# Altium PCB Copy of PCB1.PcbDoc (part 2 of 2)
Units mm, origin at the board's own origin, x right, y up, seen from the top; angles counter-clockwise.
Board outline 245 x 100 mm, 2 copper layers (Top Layer, Bottom Layer); 174 components, 196 nets, 709 pads, 287 vias.
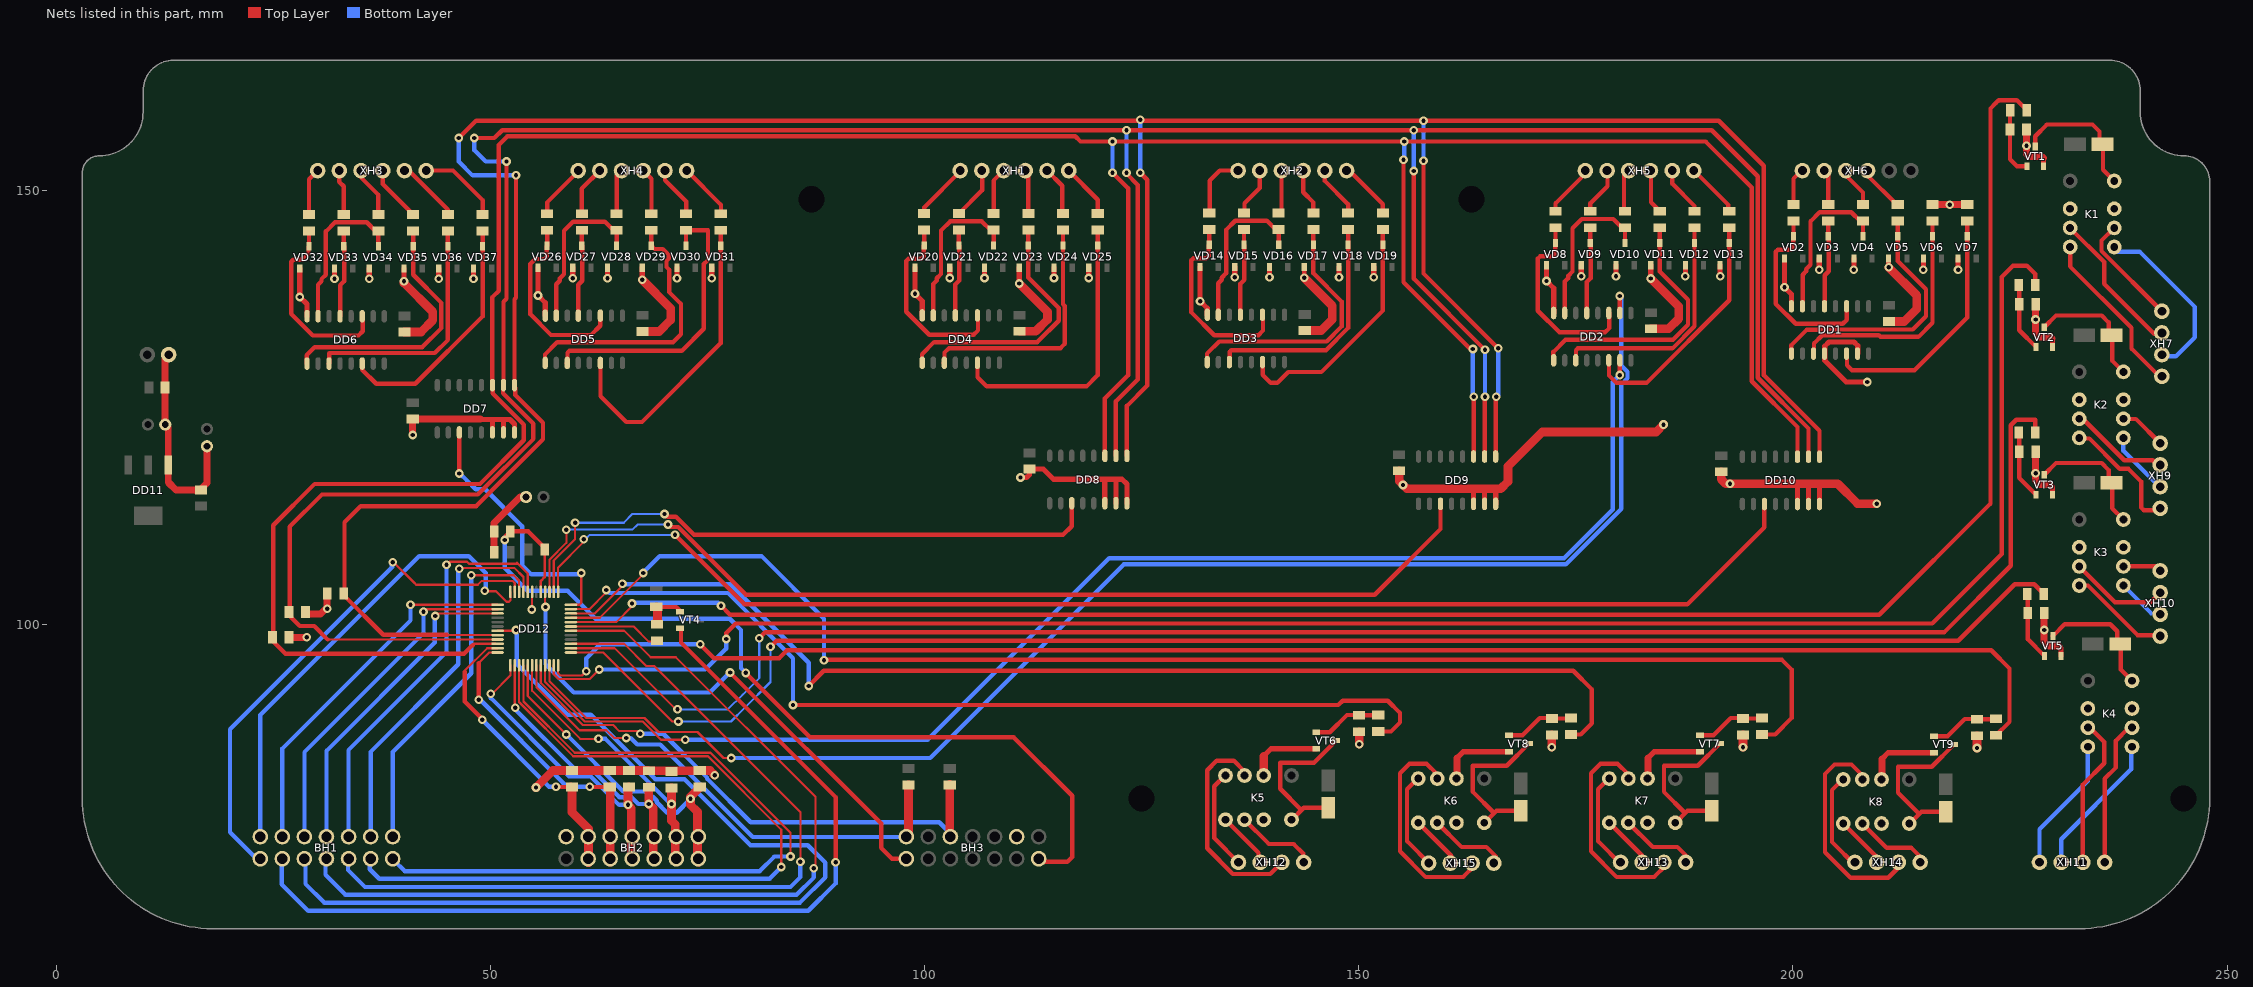
[diagram p2: the nets of this part, all layers, seen from the top]

## Via types
v1: diameter 1, hole 0.5, Top Layer to Bottom Layer, tented both sides, 287 vias

## Nets (pads, with @x,y where several pads share a name; then routed paths per layer and width w, separated by ;. In a path a pad name is that pad's centre, name@x,y a point inside that pad or via, vN(x,y) a via of type N, cw(c..) or ccw(c..) an arc to the next point about the centre after c; other vN are vias at no path point) (continued)
GND: BH2.14 BH3.9 C1.2 C2.2 C3.2 C4.2 C5.2 C6.2 C7.1 C8.1 C9.2 C10.2 C11.1 C12.1 C13.1 C14.2 C15.1 C16.1 C17.1 DD1.8 DD1.12 DD1.15 DD2.8 DD3.8 DD4.8 DD5.8 DD6.8 DD7.6 DD7.7 DD7.8 DD8.6 DD8.7 DD8.8 DD9.6 DD9.7 DD9.8 DD10.6 DD10.7 DD10.8 DD11.1 DD12.7 K1.2 K1.7 K2.2 K2.7 K3.2 K3.7 K4.2 K4.7 K5.2 K5.7 K6.2 K6.7 K7.2 K7.7 K8.2 K8.7 R2.1 R7.1 R8.1 R40.1 R42.1 R45.1 R47.1 R48.1 R50.1 R52.1 R55.1 R56.1 R58.1 R61.1 R62.1 R63.1 R64.1 R65.1 R66.1 VD2.1 VD3.1 VD4.1 VD5.1 VD6.1 VD7.1 VD8.1 VD9.1 VD10.1 VD11.1 VD12.1 VD13.1 VD14.1 VD15.1 VD16.1 VD17.1 VD18.1 VD19.1 VD20.1 VD21.1 VD22.1 VD23.1 VD24.1 VD25.1 VD26.1 VD27.1 VD28.1 VD29.1 VD30.1 VD31.1 VD32.1 VD33.1 VD34.1 VD35.1 VD36.1 VD37.1 VT1.2 VT2.2 VT3.2 VT5.2 VT6.2 VT7.2 VT8.2 VT9.2 XH8.2 | length 386.2
  Top Layer w0.25: v1(54.75,101.75) 54.8,101.8 DD12.7@54.8,103.775
  Top Layer w0.5: v1(143.729,139.971) VD17.1@143.729,141.2
  Top Layer w0.6: VD32.1@28.05,141.029 v1(28.05,137.75) 28.881,136.919 DD6.8@28.881,135.529 ; v1@32.05,139.748 v1(32.05,139.829) VD33.1@32.05,141.029 ; v1@36.05,139.748 v1(36.05,139.829) VD34.1@36.05,141.029 ; v1(40.05,139.55) VD35.1@40.05,141.029 ; v1@44.05,139.748 v1(44.05,139.829) VD36.1@44.05,141.029 ; v1@48.05,139.748 v1(48.05,139.829) VD37.1@48.05,141.029 ; 48.25,123.7 48.3,123.65 48.9,123.65 ; 48.85,123.7 48.9,123.65 ; DD7.6@50.229,122.15 50.229,123.55 ; DD7.7@51.499,122.15 51.499,123.301 ; DD7.8@52.769,122.15 52.769,123.131 52.25,123.65 48.9,123.65 ; VD26.1@55.479,141.1 v1(55.479,137.921) 56.31,137.09 DD5.8@56.31,135.6 ; v1@59.479,139.819 v1(59.479,139.9) VD27.1@59.479,141.1 ; v1@63.479,139.819 v1(63.479,139.9) VD28.1@63.479,141.1 ; v1(67.479,139.721) VD29.1@67.479,141.1 ; v1@71.479,139.819 v1(71.479,139.9) VD30.1@71.479,141.1 ; v1@75.479,139.819 v1(75.479,139.9) VD31.1@75.479,141.1 ; VD20.1@98.9,141.125 v1(98.9,138.1) 99.731,137.269 DD4.8@99.731,135.625 ; v1@102.9,139.844 v1(102.9,139.925) VD21.1@102.9,141.125 ; v1@106.9,139.844 v1(106.9,139.925) VD22.1@106.9,141.125 ; VD23.1@110.9,141.125 v1(110.9,139.3) v1@110.95,139.25 ; v1(111.05,116.95) 111.75,116.95 112.081,117.281 C11.1@112.081,117.925 113.675,117.925 114.85,116.75 120.85,116.75 ; v1@114.9,139.844 v1(114.9,139.925) VD24.1@114.9,141.125 ; v1@118.9,139.844 v1(118.9,139.925) VD25.1@118.9,141.125 ; DD8.6@120.76,114 120.76,116.66 120.85,116.75 ; DD8.7@122.03,114 122.03,116.67 121.95,116.75 ; DD8.8@123.3,114 123.3,116.2 122.75,116.75 121.95,116.75 ; VD14.1@131.729,141.2 v1(131.729,137.271) 132.56,136.44 DD3.8@132.56,135.7 ; v1@135.729,139.919 v1(135.729,140) VD15.1@135.729,141.2 ; 139.05,84.85 139.909,85.709 VT6.2@145.1,85.709 ; v1@139.729,139.919 v1(139.729,140) VD16.1@139.729,141.2 ; v1@147.729,139.919 v1(147.729,140) VD18.1@147.729,141.2 ; v1@151.729,139.919 v1(151.729,140) VD19.1@151.729,141.2 ; 161.3,84.65 162.009,85.359 VT8.2@167.3,85.359 ; 163.05,115.65 163.229,115.471 DD9.6@163.229,113.925 ; 163.95,115.65 164.05,115.55 164.499,115.55 ; DD9.7@164.499,113.925 164.499,115.55 ; 164.499,115.65 164.499,115.55 ; 165.35,115.55 164.499,115.55 ; DD9.8@165.769,113.925 165.769,115.131 ; VD8.1@171.619,141.4 v1(171.619,139.581) 172.45,138.75 DD2.8@172.45,135.9 ; v1(175.619,140.119) VD9.1@175.619,141.4 ; v1(179.619,140.119) VD10.1@179.619,141.4 ; 183.3,84.65 184.009,85.359 VT7.2@189.3,85.359 ; VD11.1@183.619,141.4 v1(183.619,139.881) v1@183.65,139.85 ; v1(187.619,140.119) VD12.1@187.619,141.4 ; v1(191.619,140.119) VD13.1@191.619,141.4 ; VD2.1@199.025,142.179 v1(199.025,138.875) 199.831,138.069 DD1.8@199.831,136.679 ; 200.5,116.3 200.53,116.27 200.53,116.25 DD10.6@200.53,113.9 ; 201.75,116.35 201.8,116.3 201.8,116.25 DD10.7@201.8,113.9 ; v1(203.025,140.898) VD3.1@203.025,142.179 ; 203.05,116.25 203.07,116.23 DD10.8@203.07,113.9 ; v1(207.025,140.898) VD4.1@207.025,142.179 ; DD1.15@207.476,131.229 207.476,132.124 207.05,132.55 204.15,132.55 203.666,132.066 203.666,130.434 206.15,127.95 v1(208.55,127.95) ; 210.25,84.55 210.959,85.259 VT9.2@216.25,85.259 ; VD5.1@211.025,142.179 v1(211.025,141.175) v1@211.05,141.15 ; v1(215.025,140.898) VD6.1@215.025,142.179 ; v1(219.025,140.898) VD7.1@219.025,142.179 ; VT1.2@228.85,152.792 228.85,153.75 ; 229.75,115.95 229.902,115.798 VT3.2@229.902,114.969 ; 229.85,132.95 229.902,132.898 VT2.2@229.902,131.969 ; 230.65,97.55 230.891,97.309 VT5.2@230.891,96.4 ; 120.85,116.75 121.95,116.75
  Top Layer w0.8: XH8.2@12.942,131.11 12.5,130.668 12.5,127.329 C7.1@12.525,127.304 12.525,123.075 C9.2@12.55,123.05 12.894,122.706 DD11.1@12.894,118.385 12.894,116.406 13.8,115.5 16.025,115.5 16.05,115.475 16.525,115.475 17.35,116.3 C10.2@17.35,120.554 ; R50.1@26.8,98.55 v1(28.85,98.55) v1@28.85,98.65 ; R47.1@28.75,101.25 30.45,101.25 31.05,101.85 v1(31.2,101.85) 31.2,103.354 31.25,103.404 R45.1@31.2,103.454 ; v1@40.05,139.35 v1(40.05,139.55) ; v1(41.05,121.85) C8.1@41.05,123.7 48.25,123.7 48.85,123.7 ; C17.1@50.425,108.546 C16.1@50.425,110.75 50.425,111.725 53.411,114.711 C14.2@54.1,114.711 ; K6.2@161.3,82.33 161.3,84.65 ; K7.2@183.3,82.33 183.3,84.65 ; K8.2@210.2,82.18 210.25,82.23 210.25,84.55 ; R7.1@216.075,148.404 R8.1@220.075,148.404 ; R2.1@226.9,157.046 v1(226.9,155.15) 226.9,154.2 227.158,153.942 228.658,153.942 228.85,153.75 ; R42.1@227.952,119.915 227.952,116.619 228.453,116.119 229.581,116.119 229.75,115.95 ; R40.1@227.952,136.915 227.952,133.619 228.453,133.119 229.681,133.119 229.85,132.95 ; R48.1@228.941,101.346 228.941,98.05 229.441,97.55 230.65,97.55
  Top Layer w1: v1@40.05,139.35 43.35,136.05 43.35,135.05 42.004,133.704 C6.2@40.1,133.704 ; v1(55.25,81.25) 57.206,83.206 R62.1@59.396,83.206 R63.1@63.737,83.206 R64.1@65.942,83.206 68.146,83.206 68.152,83.2 74.094,83.2 R61.1@74.1,83.206 75.294,83.206 v1(75.85,82.65) ; v1(67.479,139.721) 70.75,136.45 70.75,135.092 69.433,133.775 C5.2@67.529,133.775 ; C4.2@110.95,133.8 112.8,133.8 114.15,135.15 114.15,136.05 v1@110.95,139.25 ; K5.2@139.05,82.63 139.05,84.85 ; v1(143.729,139.971) 146.95,136.75 146.95,135.15 145.675,133.875 C3.2@143.779,133.875 ; R52.1@150.046,87.659 150.046,86.254 v1(150.05,86.25) ; C12.1@154.65,117.725 154.65,116.55 155.55,115.65 163.05,115.65 163.95,115.65 164.499,115.65 166.35,115.65 167.2,116.5 167.2,118.25 171.15,122.2 184.25,122.2 v1(185.1,123.05) ; v1(172.246,85.904) R56.1@172.246,87.309 ; v1@183.65,139.85 186.85,136.65 186.85,135.25 185.675,134.075 C2.2@183.669,134.075 ; C13.1@191.75,117.625 191.75,116.75 192.25,116.25 v1(192.75,116.25) 200.53,116.25 201.8,116.25 203.05,116.25 205.15,116.25 207.45,113.95 v1(209.65,113.95) ; v1(194.246,85.904) R55.1@194.246,87.309 ; C1.2@211.05,134.925 212.825,134.925 214.25,136.35 214.25,137.95 v1@211.05,141.15 ; v1(221.196,85.804) R58.1@221.196,87.209
  other v1: 228.95,99.4 155.1,116.1 227.95,117.45 227.95,135.15 218.05,148.369
NetBH3_1: BH2.1 BH2.8 DD12.29 R61.2 | length 38.1
  Top Layer w0.25: DD12.29@54.3,95.325 54.3,91.8 v1(58.75,87.35)
  Top Layer w1: BH2.1@74,72.65 73.85,72.8 73.85,78.45 73.05,79.25 v1(73.05,79.95) 73.05,80.2 74.1,81.25 R61.2@74.1,81.306
  Bottom Layer w0.5: v1(58.75,87.35) 65.3,80.8 68.073,80.8 69.15,79.723 69.15,79.55 70.35,78.35 71.45,78.35 v1(73.05,79.95)
NetBH3_2: BH2.2 BH2.9 DD12.30 R66.2 | length 32.7
  Top Layer w0.25: DD12.30@54.8,95.325 54.8,92.396 60.346,86.85 v1(62.45,86.85)
  Top Layer w1: R66.2@70.85,81.206 v1(70.85,79.35) 70.85,77.45 71.3,77 BH2.2@71.3,73.05
  Bottom Layer w0.5: v1(62.45,86.85) 63.25,86.85 70.75,79.35 v1(70.85,79.35)
NetBH3_3: BH2.3 BH2.10 DD12.26 R65.2 | length 33.8
  Top Layer w0.25: DD12.26@52.8,95.325 52.8,90.5 v1(52.85,90.45)
  Top Layer w1: R65.2@68.146,81.306 68.25,81.202 v1(68.25,79.35) 68.77,78.83 68.77,72.87 BH2.3@68.7,72.8
  Bottom Layer w0.5: v1(52.85,90.45) 52.85,90.25 59.9,83.2 61.792,83.2 64.842,80.15 66.223,80.15 67.023,79.35 v1(68.25,79.35)
NetBH3_4: BH2.4 BH2.11 DD12.25 R64.2 | length 34.5
  Top Layer w0.25: v1(50.05,92.05) 50.2,92.05 52.3,94.15 DD12.25@52.3,95.325
  Top Layer w1: R64.2@65.942,81.306 65.85,81.215 v1(65.85,79.25) 66.23,78.87 66.23,72.82 BH2.4@66.3,72.75
  Bottom Layer w0.5: v1(50.05,92.05) 50.05,91.55 59.05,82.55 61.523,82.55 64.823,79.25 v1(65.85,79.25)
NetBH3_5: BH2.5 BH2.12 DD12.24 R63.2 | length 34.9
  Top Layer w0.25: 48.65,95.584 49.866,96.8 DD12.24@50.825,96.8
  Top Layer w0.5: v1(48.65,91.35) 48.65,95.584 ; v1(61.45,81.35) 61.494,81.306 R63.2@63.737,81.306
  Top Layer w1: R63.2@63.69,81.259 R63.2@63.737,81.306 ; BH2.5@63.79,72.631 63.79,75.171 63.79,81.14 R63.2@63.85,81.2
  Bottom Layer w0.5: v1(48.65,91.35) 48.823,91.35 58.45,81.723 58.45,81.6 58.7,81.35 v1(61.45,81.35)
NetBH3_6: BH2.6 BH2.13 DD12.23 R62.2 | length 34.6
  Top Layer w0.25: 47.05,94.55 47.05,94.727 49.623,97.3 DD12.23@50.825,97.3
  Top Layer w0.5: 47.05,94.55 47.05,91.15 49.05,89.15 v1(49.05,89.05) ; v1(57.55,81.35) 57.594,81.306 R62.2@59.246,81.306
  Top Layer w1: R62.2@59.246,81.306 59.396,81.156 59.396,78.404 61.3,76.5 BH2.6@61.3,72.6
  Bottom Layer w0.5: v1@49.05,89.25 v1(49.05,89.05) 56.75,81.35 v1(57.55,81.35) v1@57.65,81.35
"NetDD1_in b1_3": DD1.3 R3.2 VD2.3 | length 22.2
  Top Layer w0.5: R3.2@200.075,146.504 VD2.3@200.075,144.729 200.025,144.679 200.025,143.45 199.775,143.2 198.275,143.2 198.025,142.95 198.025,136.95 200.325,134.65 205.75,134.65 206.206,135.106 DD1.3@206.206,136.679
"NetDD1_in b1_5": DD1.5 R4.2 VD3.3 | length 10
  Top Layer w0.5: DD1.5@203.666,136.679 203.666,140.241 204.125,140.7 VD3.3@204.125,144.7 ; VD3.3@204.075,144.729 R4.2@204.075,146.504
"NetDD1_in b1_7": DD1.7 R5.2 VD4.3 | length 18.5
  Top Layer w0.5: DD1.7@201.126,136.679 201.126,140.301 201.525,140.7 201.525,140.95 202.025,141.45 202.025,146.45 203.079,147.504 206.721,147.504 R5.2@207.775,146.45 ; VD4.3@208.075,144.729 R5.2@208.075,146.504
"NetDD1_in b1_9": DD1.9 R6.2 VD5.3 | length 30.2
  Top Layer w0.5: DD1.9@199.825,131.2 199.825,132.2 201.579,133.954 203.06,133.954 203.106,134 213.8,134 215.325,135.525 215.325,138.638 212.075,141.888 R6.2@212.075,146.504
"NetDD1_in b1_11": DD1.11 R7.2 VD6.3 | length 27.8
  Top Layer w0.5: DD1.11@202.325,131.2 202.425,131.3 202.425,132.4 203.375,133.35 209.894,133.35 210.094,133.15 214.45,133.15 216.075,134.775 R7.2@216.075,146.504
"NetDD1_in b1_14": DD1.14 R8.2 VD7.3 | length 30.9
  Top Layer w0.5: DD1.14@206.225,131.3 206.225,129.875 206.8,129.3 214,129.3 220.075,135.375 R8.2@220.075,146.504 VD7.3@220.075,144.729
"NetDD1_in b2_3": DD6.3 R33.2 VD32.3 | length 22.3
  Top Layer w0.5: R33.2@29.1,145.354 VD32.3@29.1,143.579 29.05,143.529 29.05,142.754 28.346,142.05 27.3,142.05 27.05,141.8 27.05,135.8 29.55,133.3 34.8,133.3 35.3,133.8 DD6.3@35.3,135.55
"NetDD1_in b2_5": DD6.5 R34.2 VD33.3 | length 10
  Top Layer w0.5: DD6.5@32.691,135.529 32.691,139.091 33.15,139.55 VD33.3@33.15,143.55 ; VD33.3@33.1,143.579 R34.2@33.1,145.354
"NetDD1_in b2_7": DD6.7 R35.2 VD34.3 | length 18.5
  Top Layer w0.5: DD6.7@30.151,135.529 30.151,139.151 30.55,139.55 30.55,139.8 31.05,140.3 31.05,145.3 32.104,146.354 35.746,146.354 R35.2@36.8,145.3 ; VD34.3@37.1,143.579 R35.2@37.1,145.354
"NetDD1_in b2_9": DD6.9 R36.2 VD35.3 | length 30.3
  Top Layer w0.5: DD6.9@28.85,130.05 28.85,131.05 29.75,131.95 42.131,131.95 44.35,134.169 44.35,137.05 41.1,140.3 VD35.3@41.1,143.579 R36.2@41.1,145.354
"NetDD1_in b2_11": DD6.11 R37.2 VD36.3 | length 28.1
  Top Layer w0.5: DD6.11@31.35,130.05 31.45,130.15 31.45,131.25 31.5,131.3 43.6,131.3 45.1,132.8 VD36.3@45.1,143.579 R37.2@45.1,145.354
"NetDD1_in b2_14": DD6.14 R38.2 VD37.3 | length 30.2
  Top Layer w0.5: DD6.14@35.25,130.15 35.25,129.35 36.85,127.75 41.35,127.75 49.1,135.5 VD37.3@49.1,143.579 ; VD37.3@49.1,143.579 R38.2@49.1,145.354 VD37.3@49.1,143.579
"NetDD1_in b3_3": DD5.3 R27.2 VD26.3 | length 21.8
  Top Layer w0.5: R27.2@56.529,145.425 VD26.3@56.529,143.65 56.479,143.6 56.479,142.371 56.229,142.121 55.16,142.121 54.579,141.541 54.579,135.771 56.979,133.371 61.598,133.371 62.66,134.433 DD5.3@62.66,135.6
"NetDD1_in b3_5": DD5.5 R28.2 VD27.3 | length 10
  Top Layer w0.5: DD5.5@60.12,135.6 60.12,139.162 60.579,139.621 VD27.3@60.579,143.621 ; VD27.3@60.529,143.65 R28.2@60.529,145.425
"NetDD1_in b3_7": DD5.7 R29.2 VD28.3 | length 18.5
  Top Layer w0.5: DD5.7@57.58,135.6 57.58,139.222 57.979,139.621 57.979,139.871 58.479,140.371 58.479,145.371 59.533,146.425 63.175,146.425 R29.2@64.229,145.371 ; VD28.3@64.529,143.65 R29.2@64.529,145.425
"NetDD1_in b3_9": DD5.9 R30.2 VD29.3 | length 31.8
  Top Layer w0.5: DD5.9@56.279,130.121 56.279,131.121 57.679,132.521 71.021,132.521 71.95,133.45 71.95,136.95 70.579,138.321 70.579,140.894 70.279,141.194 70.279,141.898 70.55,142.169 70.55,142.573 69.852,143.271 68.908,143.271 VD29.3@68.529,143.65 R30.2@68.529,145.425
"NetDD1_in b3_11": DD5.11 R31.2 VD30.3 | length 33.9
  Top Layer w0.5: DD5.11@58.779,130.121 58.879,130.221 58.879,131.321 59.108,131.55 72.05,131.55 74.579,134.079 74.579,141.541 75.05,142.012 75.05,145.425 R31.2@72.529,145.425 VD30.3@72.529,143.65
"NetDD1_in b3_14": DD5.14 R32.2 VD31.3 | length 37.5
  Top Layer w0.5: DD5.14@62.679,130.221 62.679,126.321 65.65,123.35 67.45,123.35 76.529,132.429 R32.2@76.529,145.425 VD31.3@76.529,143.65
"NetDD1_in b4_3": DD4.3 R21.2 VD20.3 | length 22.4
  Top Layer w0.5: R21.2@99.95,145.45 VD20.3@99.95,143.675 99.9,143.625 99.9,142.396 99.65,142.146 98.15,142.146 97.9,141.896 97.9,136.041 100.545,133.396 105.65,133.396 106.15,133.896 DD4.3@106.15,135.646
"NetDD1_in b4_5": DD4.5 R22.2 VD21.3 | length 10
  Top Layer w0.5: DD4.5@103.541,135.625 103.541,139.187 104,139.646 VD21.3@104,143.646 ; VD21.3@103.95,143.675 R22.2@103.95,145.45
"NetDD1_in b4_7": DD4.7 R23.2 VD22.3 | length 18.5
  Top Layer w0.5: DD4.7@101.001,135.625 101.001,139.247 101.4,139.646 101.4,139.896 101.9,140.396 101.9,145.396 102.954,146.45 106.596,146.45 R23.2@107.65,145.396 ; VD22.3@107.95,143.675 R23.2@107.95,145.45
"NetDD1_in b4_9": DD4.9 R24.2 VD23.3 | length 30.2
  Top Layer w0.5: DD4.9@99.7,130.146 99.7,131.146 101.1,132.546 112.977,132.546 115.45,135.019 115.45,136.481 111.95,139.981 R24.2@111.95,145.45
"NetDD1_in b4_11": DD4.11 R25.2 VD24.3 | length 28.7
  Top Layer w0.5: DD4.11@102.2,130.146 102.3,130.246 102.3,131.346 102.804,131.85 115.65,131.85 115.95,132.15 116.15,132.35 116.15,136.701 115.95,136.901 R25.2@115.95,145.45
"NetDD1_in b4_14": DD4.14 R26.2 VD25.3 | length 35
  Top Layer w0.5: DD4.14@106.1,130.246 106.1,128.5 107.15,127.45 118.65,127.45 119.95,128.75 R26.2@119.95,145.45 VD25.3@119.95,143.675
"NetDD1_in b5_3": DD3.3 R15.2 VD14.3 | length 22.7
  Top Layer w0.5: R15.2@132.779,145.525 VD14.3@132.779,143.75 132.729,143.7 132.729,142.471 132.479,142.221 130.979,142.221 130.729,141.971 130.729,135.971 133.35,133.35 138.45,133.35 138.979,133.879 DD3.3@138.979,135.721
"NetDD1_in b5_5": DD3.5 R16.2 VD15.3 | length 10
  Top Layer w0.5: DD3.5@136.37,135.7 136.37,139.262 136.829,139.721 VD15.3@136.829,143.721 ; VD15.3@136.779,143.75 R16.2@136.779,145.525
"NetDD1_in b5_7": DD3.7 R17.2 VD16.3 | length 18.5
  Top Layer w0.5: DD3.7@133.83,135.7 133.83,139.322 134.229,139.721 134.229,139.971 134.729,140.471 134.729,145.471 135.783,146.525 139.425,146.525 R17.2@140.479,145.471 ; VD16.3@140.779,143.75 R17.2@140.779,145.525
"NetDD1_in b5_9": DD3.9 R18.2 VD17.3 | length 30.3
  Top Layer w0.5: DD3.9@132.529,130.221 132.529,131.221 133.929,132.621 146.31,132.621 148.029,134.34 148.029,137.221 144.779,140.471 R18.2@144.779,145.525
"NetDD1_in b5_11": DD3.11 R19.2 VD18.3 | length 27.2
  Top Layer w0.5: DD3.11@135.129,130.321 135.129,131.421 135.329,131.621 146.229,131.621 148.779,134.171 VD18.3@148.779,143.75 R19.2@148.779,145.525
"NetDD1_in b5_14": DD3.14 R20.2 VD19.3 | length 30.3
  Top Layer w0.5: DD3.14@138.929,130.321 138.929,128.798 139.877,127.85 140.623,127.85 141.873,129.1 145.7,129.1 152.779,136.179 R20.2@152.779,145.525 VD19.3@152.779,143.75
"NetDD1_in b6_2": DD2.2 DD12.34 | length 167.9
  Top Layer w0.25: DD12.34@56.8,95.325 56.8,93.5 61.05,89.25 67.75,89.25 69.35,87.65 73.85,87.65 76.85,84.65 v1(77.75,84.65)
  Top Layer w0.5: v1(180.05,137.85) 180.07,137.83 DD2.2@180.07,135.9
  Bottom Layer w0.5: v1(77.75,84.65) 100.65,84.65 122.95,106.95 173.85,106.95 180.25,113.35 180.25,127.677 180.95,128.377 180.95,129.123 180.25,129.823 180.25,137.65 v1(180.05,137.85)
"NetDD1_in b6_3": DD2.3 R9.2 VD8.3 | length 24.3
  Top Layer w0.5: R9.2@172.669,145.725 VD8.3@172.669,143.95 172.619,143.9 172.619,142.671 172.369,142.421 170.869,142.421 170.619,142.171 170.619,136.171 173.119,133.671 178.369,133.671 178.869,134.171 ; 178.869,134.171 178.869,135.921 178.869,134.171
"NetDD1_in b6_5": DD2.5 R10.2 VD9.3 | length 10
  Top Layer w0.5: DD2.5@176.26,135.9 176.26,139.462 176.719,139.921 VD9.3@176.719,143.921 ; VD9.3@176.669,143.95 R10.2@176.669,145.725
"NetDD1_in b6_7": DD2.7 R11.2 VD10.3 | length 18.5
  Top Layer w0.5: DD2.7@173.72,135.9 173.72,139.522 174.119,139.921 174.119,140.171 174.619,140.671 174.619,145.671 175.673,146.725 179.315,146.725 R11.2@180.369,145.671 ; VD10.3@180.669,143.95 R11.2@180.669,145.725
"NetDD1_in b6_9": DD2.9 R12.2 VD11.3 | length 30.3
  Top Layer w0.5: DD2.9@172.419,130.421 172.419,131.421 173.819,132.821 186.2,132.821 187.919,134.54 187.919,137.421 184.669,140.671 R12.2@184.669,145.725
"NetDD1_in b6_11": DD2.11 R13.2 VD12.3 | length 27.5
  Top Layer w0.5: R13.2@188.669,145.725 VD12.3@188.669,143.95 188.669,134.371 186.119,131.821 175.219,131.821 175.019,131.621 DD2.11@175.019,130.521 ; DD2.11@175.019,130.521 174.919,130.421 DD2.11@175.019,130.521
"NetDD1_in b6_14": DD2.14 R14.2 VD13.3 | length 30.1
  Top Layer w0.5: DD2.14@178.819,130.521 178.819,128.708 179.677,127.85 183.148,127.85 192.669,137.371 R14.2@192.669,145.725 VD13.3@192.669,143.95
"NetDD1_in b6_15": DD2.15 DD12.33 | length 156.1
  Top Layer w0.25: DD12.33@56.3,95.325 56.3,93.4 60.85,88.85 67.55,88.85 69.65,86.75 v1(72.45,86.75)
  Top Layer w0.5: v1(180.05,128.75) 180.07,128.77 DD2.15@180.07,130.45
  Bottom Layer w0.5: v1(72.45,86.75) 100.35,86.75 121.25,107.65 173.631,107.65 179.25,113.269 179.25,127.95 v1(180.05,128.75)
NetDD2_3: DD7.3 DD12.48 | length 31
  Top Layer w0.25: DD12.48@59.275,102.3 60.239,102.3 60.45,102.511 v1(60.45,105.95)
  Top Layer w0.5: v1(46.419,117.419) DD7.3@46.419,122.15
  Bottom Layer w0.5: v1@46.4,117.45 46.45,117.45 47.35,116.55 48.3,115.6 49.4,115.6 53.65,111.35 53.65,106.85 54.7,105.8 60.3,105.8 v1(60.45,105.95)
NetDD2_9: DD7.9 DD8.9 DD9.9 DD10.9 DD12.20 R45.2 | length 367.2
  Top Layer w0.25: 45.1,98.8 DD12.20@50.4,98.8
  Top Layer w0.5: R45.2@33.2,103.3 37.65,98.85 45,98.85 ; R45.2@33.2,103.65 33.2,111.8 35.05,113.65 48.35,113.65 56.05,121.35 56.05,123.25 52.85,126.45 DD7.9@52.85,127.3 ; v1(46.35,156.05) 48.35,158.05 v1(157.45,158.05) 191.45,158.05 196.65,152.85 196.65,128.75 203.07,122.33 DD10.9@203.07,119.35 ; DD7.9@52.769,127.6 52.769,137.469 52.95,137.65 v1(52.95,151.75) ; DD8.9@123.3,119.45 123.3,125.2 125.65,127.55 125.65,151.25 v1(124.85,152.05) ; v1(157.45,153.45) 157.45,140.45 v1(166.05,131.85) ; DD9.9@165.769,119.375 165.769,126.169 v1(165.85,126.25)
  Bottom Layer w0.5: v1(46.35,156.05) 46.35,153.35 47.95,151.75 v1(52.95,151.75) ; v1(124.85,152.05) v1(124.85,158.15) ; v1(157.45,153.45) v1(157.45,158.05) ; v1(165.85,126.25) 166.05,126.45 v1(166.05,131.85)
NetDD2_10: DD7.10 DD8.10 DD9.10 DD10.10 DD12.21 R47.2 | length 371.5
  Top Layer w0.25: 31.25,98.3 DD12.21@50.55,98.3
  Top Layer w0.5: R47.2@26.75,101.7 26.9,101.85 26.9,111.3 30.6,115 48.55,115 54.95,121.4 54.95,123.15 51.45,126.65 51.45,127.55 DD7.10@51.55,127.65 ; R47.2@26.85,101.25 R47.2@26.95,101.35 ; R47.2@26.95,100.95 28.05,99.85 29.7,99.85 31.25,98.3 ; v1(48.15,156.05) 50.45,156.05 51.35,156.95 v1(123.25,156.95) v1(156.35,156.95) 190.65,156.95 195.95,151.65 195.95,128.45 201.8,122.6 DD10.10@201.8,119.35 ; DD7.10@51.499,127.6 51.499,137.199 51.85,137.55 51.85,153.15 52.05,153.35 v1(51.85,153.35) ; DD8.10@122.03,119.45 122.03,125.73 124.55,128.25 124.55,150.65 123.25,151.95 v1(123.25,152.05) ; v1(156.35,152.25) 156.35,139.85 v1(164.55,131.65) ; DD9.10@164.499,119.375 164.499,126.199 v1(164.55,126.25)
  Bottom Layer w0.5: v1(48.15,156.05) 48.15,154.65 49.45,153.35 v1(51.85,153.35) ; v1(123.25,152.05) v1(123.25,156.95) ; v1(156.35,152.25) v1(156.35,156.95) ; v1(164.55,126.25) v1(164.55,131.65)
NetDD2_11: DD7.11 DD8.11 DD9.11 DD10.11 DD12.22 R50.2 | length 366.9
  Top Layer w0.25: 47.95,97.65 48.1,97.8 DD12.22@50.55,97.8
  Top Layer w0.5: R50.2@24.85,98.2 26.4,96.65 46.95,96.65 47.95,97.65 ; R50.2@24.9,98.55 25,98.65 25,111.45 29.75,116.2 48.8,116.2 53.85,121.25 53.85,123.05 50.25,126.65 DD7.11@50.25,127.75 ; DD7.11@50.229,127.6 50.229,137.729 50.95,138.45 50.95,155.25 51.95,156.25 117.35,156.25 117.95,155.65 v1(121.65,155.65) 125.85,155.65 v1(155.25,155.65) 156.35,155.65 189.95,155.65 195.25,150.35 195.25,128.05 200.53,122.77 DD10.11@200.53,119.35 ; DD8.11@120.76,119.45 120.76,126.06 123.45,128.75 123.45,150.25 v1(121.65,152.05) ; v1(155.15,153.55) 155.15,139.45 162.85,131.75 v1(163.15,131.75) ; DD9.11@163.229,119.375 163.25,119.396 v1(163.25,126.25)
  Bottom Layer w0.5: v1(121.65,152.05) v1(121.65,155.65) ; v1(155.15,153.55) 155.25,153.65 v1(155.25,155.65) ; v1(163.15,131.75) 163.15,126.35 v1(163.25,126.25)
NetDD4_3: DD10.3 DD12.1 | length 153.1
  Top Layer w0.25: DD12.1@57.8,103.775 57.8,106.6 60.75,109.55 v1(60.75,109.85)
  Top Layer w0.5: v1(71.25,110.35) 79.25,102.35 187.85,102.35 196.72,111.22 DD10.3@196.72,113.9
  Bottom Layer w0.25: v1(60.75,109.85) 60.95,109.85 61.45,110.35 v1(71.25,110.35)
NetDD5_3: DD8.3 DD12.2 | length 70.7
  Top Layer w0.25: DD12.2@57.3,103.775 57.3,107.4 59.75,109.85 v1(59.75,111.75)
  Top Layer w0.5: v1(70.05,112.75) 70.35,112.45 71.342,112.45 73.442,110.35 115.95,110.35 116.95,111.35 DD8.3@116.95,114
  Bottom Layer w0.25: v1(59.75,111.75) 65.35,111.75 66.35,112.75 v1(70.05,112.75)
NetDD6_3: DD9.3 DD12.3 | length 118.3
  Top Layer w0.25: DD12.3@56.8,103.775 56.8,107.5 58.75,109.45 v1(58.75,110.95)
  Top Layer w0.5: v1(70.45,111.55) 70.75,111.25 71.623,111.25 79.423,103.45 151.85,103.45 159.419,111.019 DD9.3@159.419,113.925
  Bottom Layer w0.25: v1(58.75,110.95) 66.35,110.95 66.95,111.55 v1(70.45,111.55)
NetDD7_35: DD12.35 R39.1 | length 213
  Top Layer w0.25: DD12.35@57.3,95.325 57.3,94.334 57.884,93.75 61.45,93.75 v1(62.55,94.85)
  Top Layer w0.5: v1(77.15,98.35) 77.15,99.05 78.25,100.15 216.05,100.15 224.05,108.15 224.05,136.85 224.05,140.05 225.35,141.35 226.95,141.35 227.902,140.398 R39.1@227.902,139.119
  Bottom Layer w0.5: v1(62.55,94.85) 74.75,94.85 77.15,97.25 v1(77.15,98.35)
NetDD7_36: DD12.36 R57.1 | length 180.8
  Top Layer w0.25: DD12.36@57.8,95.325 57.8,94.4 58.05,94.15 60.55,94.15 v1(61.05,94.65)
  Top Layer w0.5: v1(74.15,97.75) 75.75,96.15 83.25,96.15 84.15,97.05 222.85,97.05 224.95,94.95 224.95,88.809 R57.1@223.4,87.259
  Bottom Layer w0.5: v1(61.05,94.65) 61.05,96.15 62.65,97.75 v1(74.15,97.75)
NetDD7_37: DD12.37 R46.1 | length 182.3
  Top Layer w0.25: DD12.37@59.275,96.8 63,96.8 70.95,88.85 v1(71.65,88.85)
  Top Layer w0.5: v1(82.25,97.45) 82.95,98.15 219.05,98.15 225.55,104.65 227.791,104.65 R46.1@228.891,103.55
  Bottom Layer w0.25: v1(71.65,88.85) 77.7,88.85 79.3,90.45 82.25,93.4 v1(82.25,97.45)
NetDD7_38: DD12.38 R41.1 | length 199
  Top Layer w0.25: DD12.38@59.275,97.3 64.3,97.3 71.35,90.25 v1(71.55,90.25)
  Top Layer w0.5: v1(80.95,98.45) 81.65,99.15 217.45,99.15 225.103,106.803 225.103,122.985 225.715,123.598 227.902,123.598 R41.1@227.902,122.119
  Bottom Layer w0.25: v1(71.55,90.25) 77.35,90.25 79.05,91.95 80.95,93.85 v1(80.95,98.45)
NetDD7_43: DD12.43 R49.1 | length 10.5
  Top Layer w0.25: DD12.43@59.275,99.8 66.5,99.8 68.25,98.05 R49.1@69.05,98.05
NetDD7_44: DD12.44 R1.1 | length 221.1
  Top Layer w0.25: DD12.44@59.275,100.3 64.5,100.3 66.35,102.15 66.35,102.4 v1(66.3,102.45)
  Top Layer w0.5: v1(76.55,102.2) 77.6,101.15 209.95,101.15 222.75,113.95 222.75,157.35 222.75,159.45 223.35,160.05 223.7,160.4 225.8,160.4 R1.1@226.95,159.25
  Bottom Layer w0.5: v1(66.3,102.45) 66.4,102.55 76.2,102.55 v1(76.55,102.2)
NetDD7_45: DD12.45 R54.1 | length 161.7
  Top Layer w0.25: DD12.45@59.275,100.8 62.596,100.8 67.6,105.804 v1(67.6,105.95)
  Top Layer w0.5: v1@88.42,95.92 v1(88.42,95.917) 88.453,95.95 198.75,95.95 199.85,94.85 199.85,89.25 197.959,87.359 R54.1@196.45,87.359
  Bottom Layer w0.5: v1(67.6,105.95) 67.6,106 69.5,107.9 81.219,107.9 88.42,100.7 v1(88.42,95.917)
NetDD7_46: DD12.46 R53.1 | length 134
  Top Layer w0.25: DD12.46@59.275,101.3 62,101.3 65.2,104.5 v1(65.2,104.712)
  Top Layer w0.5: v1(86.65,92.95) 88.4,94.7 174.7,94.7 176.85,92.55 176.85,88.65 175.559,87.359 R53.1@174.45,87.359
  Bottom Layer w0.5: v1(65.2,104.712) 65.2,104.7 65.25,104.65 77.623,104.65 86.65,95.623 v1(86.65,92.95)
NetDD7_47: DD12.47 R51.1 | length 110.1
  Top Layer w0.25: DD12.47@59.275,101.8 61.4,101.8 63.35,103.75 v1(63.35,104)
  Top Layer w0.5: v1(84.85,90.75) 147.65,90.75 148.15,91.25 153.35,91.25 154.75,89.85 154.75,88.75 153.709,87.709 R51.1@152.25,87.709
  Bottom Layer w0.5: v1@63.3,104.05 v1(63.35,104) 63.7,103.65 77.35,103.65 84.85,96.15 v1(84.85,90.75)
NetK1_U_РЕЛЕ1_3: K2.3 XH9.2 | length 10.9
  Top Layer w0.5: K2.3@232.982,123.719 233.381,123.719 238.15,118.95 241.45,118.95 XH9.2@241.8,118.6
NetK1_U_РЕЛЕ1_4: K2.4 XH9.4 | length 14.1
  Top Layer w0.5: K2.4@233.15,121.45 234.15,121.45 237.65,117.95 238.65,117.95 240.1,116.5 240.1,113.5 240.4,113.2 XH9.4@242.1,113.2
NetK1_U_РЕЛЕ1_5: K2.5 XH9.3 | length 7.9
  Bottom Layer w0.5: K2.5@238.062,121.519 238.062,120.038 242.25,115.85 XH9.3@242.3,115.9 XH9.3@242.6,116.2
NetK1_U_РЕЛЕ1_6: K2.6 XH9.1 | length 5.4
  Top Layer w0.5: K2.6@238.1,123.7 239.5,123.7 XH9.1@242.3,120.9
NetK1_U_РЕЛЕ1_8: K2.8 VD38.2 VT2.3 | length 13.8
  Top Layer w0.5: VT2.3@228.952,134.269 230.302,135.619 235.562,135.619 236.362,134.819 VD38.2@236.362,134.119 ; VD38.2@236.762,133.419 236.762,130.419 K2.8@238.062,129.119
NetK1_U_РЕЛЕ2_3: K8.3 XH14.2 | length 24.9
  Top Layer w0.5: K8.3@207.95,82.35 207.95,82.7 206.75,83.9 204.8,83.9 203.7,82.8 203.7,73.8 206.65,70.85 210.97,70.85 XH14.2@212.3,72.18
NetK1_U_РЕЛЕ2_4: K8.4 XH14.4 | length 11.7
  Top Layer w0.5: K8.4@205.8,82.2 205.75,82.2 204.5,80.95 204.5,74.98 XH14.4@207.3,72.18
NetK1_U_РЕЛЕ2_5: K8.5 XH14.3 | length 6.3
  Top Layer w0.5: K8.5@205.8,77.1 209.6,73.3 XH14.3@209.6,72.4
NetK1_U_РЕЛЕ2_6: K8.6 XH14.1 | length 9.3
  Top Layer w0.5: K8.6@208,77.1 210.8,74.3 213.65,74.3 214.75,73.2 XH14.1@214.75,72.3
NetK1_U_РЕЛЕ2_8: K8.8 VD44.2 VT9.3 | length 18.6
  Top Layer w0.5: K8.8@213.45,77.1 214.814,78.464 VD44.2@217.629,78.464 ; 214.5,78.25 212.1,80.65 212.1,83.65 215.991,83.65 VT9.3@218.55,86.209
NetK1_U_РЕЛЕ3_3: K4.3 XH11.2 | length 17.2
  Top Layer w0.5: XH11.2@233.4,72.63 233.4,81.6 235.85,84.05 235.85,86.5 K4.3@234.2,88.15
NetK1_U_РЕЛЕ3_4: K4.4 XH11.4 | length 15.7
  Bottom Layer w0.5: XH11.4@228.4,72.63 228.4,76.45 233.95,82 K4.4@233.95,86
NetK1_U_РЕЛЕ3_5: K4.5 XH11.3 | length 16.6
  Bottom Layer w0.5: XH11.3@230.9,72.63 230.9,75.3 238.95,83.35 238.95,85.65 K4.5@239.15,85.85
NetK1_U_РЕЛЕ3_6: K4.6 XH11.1 | length 16.6
  Top Layer w0.5: XH11.1@235.9,72.63 235.9,82.25 237.2,83.55 237.2,86.65 K4.6@238.65,88.1
NetK1_U_РЕЛЕ3_8: K4.8 VD40.2 VT5.3 | length 13.8
  Top Layer w0.5: VT5.3@229.941,98.7 231.291,100.05 236.55,100.05 237.35,99.25 VD40.2@237.35,98.55 ; VD40.2@237.75,97.85 237.75,94.85 K4.8@239.05,93.55
NetK1_U_РЕЛЕ4_3: K3.3 XH10.2 | length 11.4
  Top Layer w0.5: K3.3@232.982,106.719 237.101,102.6 241.2,102.6 XH10.2@242.25,103.65
NetK1_U_РЕЛЕ4_4: K3.4 XH10.4 | length 11.8
  Top Layer w0.5: K3.4@232.982,104.519 233.981,104.519 239.694,98.806 XH10.4@242.4,98.806
NetK1_U_РЕЛЕ4_5: K3.5 XH10.3 | length 4.7
  Bottom Layer w0.5: K3.5@238.281,104.519 K3.5@238.062,104.519 241.24,101.34
NetK1_U_РЕЛЕ4_6: K3.6 XH10.1 | length 4.1
  Top Layer w0.5: K3.6@238.062,106.719 XH10.1@242.2,106.719
NetK1_U_РЕЛЕ4_8: K3.8 VD39.2 VT3.3 | length 13.8
  Top Layer w0.5: VT3.3@228.952,117.269 230.302,118.619 235.562,118.619 236.362,117.819 VD39.2@236.362,117.119 ; VD39.2@236.762,116.419 236.762,113.419 K3.8@238.062,112.119
NetK1_U_РЕЛЕ5_3: K1.3 XH7.2 | length 17.3
  Top Layer w0.5: K1.3@231.929,145.7 235.85,141.779 235.85,139.25 241.6,133.5 XH7.2@242.7,133.5
NetK1_U_РЕЛЕ5_4: K1.4 XH7.4 | length 19
  Top Layer w0.5: K1.4@231.929,143.5 231.929,141.271 239,134.2 239,131.8 XH7.4@242.1,128.7
NetK1_U_РЕЛЕ5_5: K1.5 XH7.3 | length 20.8
  Bottom Layer w0.5: K1.5@237.009,143.5 237.009,142.939 239.961,142.939 246.3,136.6 246.3,133.1 244.1,130.9 242.8,130.9 XH7.3@242.5,131.2
NetK1_U_РЕЛЕ5_6: K1.6 XH7.1 | length 13.2
  Top Layer w0.5: K1.6@237.009,145.7 235.55,144.241 235.55,143.05 XH7.1@242.55,136.05
NetK1_U_РЕЛЕ5_8: K1.8 VD1.2 VT1.3 | length 15
  Top Layer w0.5: VT1.3@227.9,155.092 227.9,156.25 229.25,157.6 234.509,157.6 235.309,156.8 VD1.2@235.309,156.1 ; VD1.2@235.709,155.4 235.709,152.4 K1.8@237.009,151.1
NetK1_U_РЕЛЕ6_3: K7.3 XH13.2 | length 24.9
  Top Layer w0.5: K7.3@181,82.45 181,82.8 179.8,84 177.85,84 176.75,82.9 176.75,73.9 179.7,70.95 184.02,70.95 XH13.2@185.35,72.28
NetK1_U_РЕЛЕ6_4: K7.4 XH13.4 | length 11.7
  Top Layer w0.5: K7.4@178.85,82.3 178.8,82.3 177.55,81.05 177.55,75.08 XH13.4@180.35,72.28
NetK1_U_РЕЛЕ6_5: K7.5 XH13.3 | length 6.3
  Top Layer w0.5: K7.5@178.85,77.2 182.65,73.4 XH13.3@182.65,72.5
NetK1_U_РЕЛЕ6_6: K7.6 XH13.1 | length 9.3
  Top Layer w0.5: K7.6@181.05,77.2 183.85,74.4 186.7,74.4 187.8,73.3 XH13.1@187.8,72.4
NetK1_U_РЕЛЕ6_8: K7.8 VD43.2 VT7.3 | length 18.6
  Top Layer w0.5: K7.8@186.5,77.2 187.864,78.564 VD43.2@190.679,78.564 ; 187.55,78.35 185.15,80.75 185.15,83.75 189.041,83.75 VT7.3@191.6,86.309
NetK1_U_РЕЛЕ7_3: K6.3 XH15.2 | length 24.9
  Top Layer w0.5: K6.3@159,82.45 159,82.8 157.8,84 155.85,84 154.75,82.9 154.75,73.9 157.7,70.95 162.02,70.95 XH15.2@163.35,72.28
NetK1_U_РЕЛЕ7_4: K6.4 XH15.4 | length 11.7
  Top Layer w0.5: K6.4@156.85,82.3 156.8,82.3 155.55,81.05 155.55,75.08 XH15.4@158.35,72.28
NetK1_U_РЕЛЕ7_5: K6.5 XH15.3 | length 6.3
  Top Layer w0.5: K6.5@156.85,77.2 160.65,73.4 XH15.3@160.65,72.5
NetK1_U_РЕЛЕ7_6: K6.6 XH15.1 | length 9.3
  Top Layer w0.5: K6.6@159.05,77.2 161.85,74.4 164.7,74.4 165.8,73.3 XH15.1@165.8,72.4
NetK1_U_РЕЛЕ7_8: K6.8 VD42.2 VT8.3 | length 18.6
  Top Layer w0.5: K6.8@164.5,77.2 165.864,78.564 VD42.2@168.679,78.564 ; 165.55,78.35 163.15,80.75 163.15,83.75 167.041,83.75 VT8.3@169.6,86.309
NetK1_U_РЕЛЕ8_3: K5.3 XH12.2 | length 24.9
  Top Layer w0.5: K5.3@136.8,82.8 136.8,83.15 135.6,84.35 133.65,84.35 132.55,83.25 132.55,74.25 135.5,71.3 139.82,71.3 XH12.2@141.15,72.63
NetK1_U_РЕЛЕ8_4: K5.4 XH12.4 | length 11.7
  Top Layer w0.5: K5.4@134.65,82.65 134.6,82.65 133.35,81.4 133.35,75.43 XH12.4@136.15,72.63
NetK1_U_РЕЛЕ8_5: K5.5 XH12.3 | length 6.3
  Top Layer w0.5: K5.5@134.65,77.55 138.45,73.75 XH12.3@138.45,72.85
NetK1_U_РЕЛЕ8_6: K5.6 XH12.1 | length 9.3
  Top Layer w0.5: K5.6@136.85,77.55 139.65,74.75 142.5,74.75 143.6,73.65 XH12.1@143.6,72.75
NetK1_U_РЕЛЕ8_8: K5.8 VD41.2 VT6.3 | length 18.6
  Top Layer w0.5: K5.8@142.3,77.55 143.664,78.914 VD41.2@146.479,78.914 ; 143.35,78.7 140.95,81.1 140.95,84.1 144.841,84.1 VT6.3@147.4,86.659
"NetR1_in b1_1": R3.1 XH6.1 | length 4.3
  Top Layer w0.5: R3.1@200.075,148.404 200.075,151.375 XH6.1@201.05,152.35
"NetR1_in b2_1": R33.1 XH3.1 | length 5.5
  Top Layer w0.5: R33.1@29.1,147.254 29.1,151.304 XH3.1@30.1,152.304
"NetR1_in b3_1": R27.1 XH4.1 | length 6.4
  Top Layer w0.5: R27.1@56.529,147.325 56.529,148.629 XH4.1@60.15,152.25
"NetR1_in b4_1": R21.1 XH1.1 | length 6.6
  Top Layer w0.5: R21.1@99.95,147.35 99.95,148.05 XH1.1@104.15,152.25
"NetR1_in b5_1": R15.1 XH2.1 | length 7.5
  Top Layer w0.5: R15.1@132.729,147.467 R15.1@132.829,147.567 ; R15.1@132.85,147.567 132.85,151.15 134.004,152.304 XH2.1@136.1,152.304
"NetR1_in b6_1": R9.1 XH5.1 | length 6
  Top Layer w0.5: R9.1@172.669,147.625 172.669,148.527 176.05,151.908 XH5.1@176.05,152.25
"NetR2_in b1_1": R4.1 XH6.2 | length 4.2
  Top Layer w0.5: XH6.2@203.55,152.35 204.075,151.825 R4.1@204.075,148.404
"NetR2_in b2_1": R34.1 XH3.2 | length 5.3
  Top Layer w0.5: XH3.2@32.6,152.304 32.6,151 33.1,150.5 R34.1@33.1,147.254
"NetR2_in b3_1": R28.1 XH4.2 | length 5.9
  Top Layer w0.5: R28.1@60.529,147.325 60.529,150.229 XH4.2@62.65,152.35
"NetR2_in b4_1": R22.1 XH1.2 | length 6.2
  Top Layer w0.5: R22.1@103.95,147.35 106.65,150.05 XH1.2@106.65,152.45
"NetR2_in b5_1": R16.1 XH2.2 | length 5.4
  Top Layer w0.5: R16.1@136.85,147.65 136.85,148.55 138.6,150.3 XH2.2@138.6,152.304
"NetR2_in b6_1": R10.1 XH5.2 | length 5.4
  Top Layer w0.5: R10.1@176.669,147.625 176.669,148.527 178.65,150.508 XH5.2@178.65,152.25
"NetR3_in b1_1": R5.1 XH6.3 | length 4.7
  Top Layer w0.5: XH6.3@206.05,152.25 206.05,151.8 208.075,149.775 R5.1@208.075,148.404
"NetR3_in b2_1": R35.1 XH3.3 | length 5.9
  Top Layer w0.5: XH3.3@35.1,152.304 35.1,151.5 37.1,149.5 R35.1@37.1,147.254
"NetR3_in b3_1": R29.1 XH4.3 | length 5.3
  Top Layer w0.5: R29.1@64.55,147.25 64.55,151.754 XH4.3@65.1,152.304
"NetR3_in b4_1": R23.1 XH1.3 | length 5.4
  Top Layer w0.5: R23.1@107.95,147.35 107.95,151.15 XH1.3@109.05,152.25
"NetR3_in b5_1": R17.1 XH2.3 | length 5.4
  Top Layer w0.5: R17.1@140.779,147.425 141.1,147.746 XH2.3@141.1,152.304 ; R17.1@140.829,147.467 R17.1@141.079,147.717
"NetR3_in b6_1": R11.1 XH5.3 | length 5
  Top Layer w0.5: R11.1@180.55,147.625 180.55,151.75 XH5.3@181.15,152.35
"NetR4_in b1_1": R6.1 XH6.4 | length 5.4
  Top Layer w0.5: XH6.4@208.6,152.304 208.6,151.75 211.9,148.45 R6.1@212.05,148.45
"NetR4_in b2_1": R36.1 XH3.4 | length 6.5
  Top Layer w0.5: XH3.4@37.6,152.304 37.6,150.754 R36.1@41.1,147.254
"NetR4_in b3_1": R30.1 XH4.4 | length 5.3
  Top Layer w0.5: XH4.4@67.6,152.304 68.55,151.354 R30.1@68.55,147.35
"NetR4_in b4_1": R24.1 XH1.4 | length 5.1
  Top Layer w0.5: XH1.4@111.55,152.25 111.95,151.85 R24.1@111.95,147.35
"NetR4_in b5_1": R18.1 XH2.4 | length 5.4
  Top Layer w0.5: XH2.4@143.6,152.304 143.6,149.8 144.779,148.621 R18.1@144.779,147.425
"NetR4_in b6_1": R12.1 XH5.4 | length 5
  Top Layer w0.5: XH5.4@183.65,152.25 183.65,148.644 R12.1@184.669,147.625
"NetR5_in b2_1": R37.1 XH3.5 | length 7.4
  Top Layer w0.5: XH3.5@40.1,152.304 40.596,152.304 45.1,147.8 R37.1@45.1,147.254
"NetR5_in b3_1": R31.1 XH4.5 | length 6.2
  Top Layer w0.5: XH4.5@70.1,152.304 70.1,151.2 72.55,148.75 R31.1@72.55,147.15 ; R31.1@72.529,147.325 R31.1@72.529,147.375
"NetR5_in b4_1": R25.1 XH1.5 | length 5.7
  Top Layer w0.5: XH1.5@114.1,152.304 115.85,150.554 R25.1@115.85,147.35 ; R25.1@115.95,147.35 R25.1@115.95,147.4
"NetR5_in b5_1": R19.1 XH2.5 | length 6
  Top Layer w0.5: XH2.5@146.1,152.304 146.1,151.1 148.779,148.421 148.779,147.475 R19.1@148.779,147.425
"NetR5_in b6_1": R13.1 XH5.5 | length 5.7
  Top Layer w0.5: XH5.5@186.1,152.304 186.1,150.8 188.669,148.231 188.669,147.675 R13.1@188.669,147.625
"NetR6_in b2_1": R38.1 XH3.6 | length 9.6
  Top Layer w0.5: XH3.6@42.6,152.304 45.696,152.304 49.1,148.9 R38.1@49.1,147.254
"NetR6_in b3_1": R32.1 XH4.6 | length 6.6
  Top Layer w0.5: XH4.6@72.6,152.304 76.55,148.354 R32.1@76.55,147.35
"NetR6_in b4_1": R26.1 XH1.6 | length 6.3
  Top Layer w0.5: XH1.6@116.6,152.304 119.95,148.954 R26.1@119.95,147.35
"NetR6_in b5_1": R20.1 XH2.6 | length 6.9
  Top Layer w0.5: XH2.6@148.45,152.25 148.958,152.25 152.779,148.429 R20.1@152.779,147.425
"NetR6_in b6_1": R14.1 XH5.6 | length 6.3
  Top Layer w0.5: XH5.6@188.6,152.304 192.569,148.335 192.569,147.671 R14.1@192.569,147.667
NetR13_1: R44.1 R49.2 VT4.1 | length 5.2
  Top Layer w0.5: R49.2@69.05,99.95 R49.2@69.25,100.15 ; R44.1@69.25,102.05 71.404,102.05 VT4.1@71.95,101.504
  Top Layer w1: R44.1@69.1,102.064 69.25,101.914 R49.2@69.25,100.15
NetR21_U_РЕЛЕ1_2: R39.2 R40.2 VT2.1 | length 7.9
  Top Layer w0.5: R39.2@226.003,139.119 226.053,139.069 R40.2@226.053,136.915 ; R40.2@226.062,136.819 226.062,133.91 VT2.1@228.003,131.969
NetR21_U_РЕЛЕ2_2: R57.2 R58.2 VT9.1 | length 7.9
  Top Layer w0.5: VT9.1@216.25,87.159 217.809,87.159 219.8,89.15 R58.2@221.2,89.15 ; R58.2@221.196,89.109 223.259,89.109 R57.2@223.3,89.15
NetR21_U_РЕЛЕ3_2: R46.2 R48.2 VT5.1 | length 8.2
  Top Layer w0.5: R46.2@226.95,103.85 227.041,103.759 R48.2@227.041,101.346 ; R48.2@227.05,101.25 227.05,98.341 VT5.1@228.991,96.4
NetR21_U_РЕЛЕ4_2: R41.2 R42.2 VT3.1 | length 8.2
  Top Layer w0.5: R41.2@225.962,122.419 226.053,122.328 R42.2@226.053,119.915 ; R42.2@226.062,119.819 226.062,116.91 VT3.1@228.003,114.969
NetR21_U_РЕЛЕ5_2: R1.2 R2.2 VT1.1 | length 8
  Top Layer w0.5: R1.2@225.05,159.25 225,159.2 R2.2@225,157.046 225,153.6 225.808,152.792 VT1.1@226.95,152.792
NetR21_U_РЕЛЕ6_2: R54.2 R55.2 VT7.1 | length 7.9
  Top Layer w0.5: VT7.1@189.3,87.259 190.859,87.259 192.85,89.25 R55.2@194.25,89.25 ; R55.2@194.246,89.209 196.309,89.209 R54.2@196.35,89.25
NetR21_U_РЕЛЕ7_2: R53.2 R56.2 VT8.1 | length 7.9
  Top Layer w0.5: VT8.1@167.3,87.259 168.859,87.259 170.85,89.25 R56.2@172.25,89.25 ; R56.2@172.246,89.209 174.309,89.209 R53.2@174.35,89.25
NetR21_U_РЕЛЕ8_2: R51.2 R52.2 VT6.1 | length 7.9
  Top Layer w0.5: VT6.1@145.1,87.609 146.659,87.609 148.65,89.6 R52.2@150.05,89.6 ; R52.2@150.046,89.559 152.109,89.559 R51.2@152.15,89.6
RxD: BH3.14 DD12.31 R59.1 | length 58
  Top Layer w0.25: DD12.31@55.3,95.325 55.3,92.8 60.25,87.85 63.35,87.85 64.25,86.95 v1(65.65,86.95)
  Top Layer w0.5: BH3.14@97.85,75.8 BH3.14@98.15,76.1
  Top Layer w1: BH3.14@98.15,76.1 R59.1@98.15,81.55
  Bottom Layer w0.5: v1(65.65,86.95) 66.15,86.95 66.9,86.2 69.55,86.2 80.2,75.55 BH3.14@97.8,75.55
S1: BH1.1 DD12.28 | length 90.8
  Top Layer w0.25: DD12.28@53.8,95.3 53.8,91.162 59.712,85.25 75.35,85.25 84.55,76.05 v1(84.55,73.3)
  Bottom Layer w0.5: BH1.1@38.85,72.9 40.15,71.6 81,71.6 82.7,73.3 v1(84.55,73.3)
SB1.1: BH1.3 DD12.39 | length 96
  Top Layer w0.25: DD12.39@59.4,97.8 65.4,97.8 67.95,95.25 68.85,95.25 85.7,78.4 v1(85.7,72.7)
  Bottom Layer w0.5: BH1.3@33.6,72.55 33.6,71.75 35.55,69.8 84.55,69.8 85.7,70.95 v1(85.7,72.7)
SB1.2: BH1.4 DD12.42 | length 105.2
  Top Layer w0.25: DD12.42@59.275,99.3 65.4,99.3 68.45,96.25 71.35,96.25 87.45,80.15 87.45,72.15 v1(87.25,71.95)
  Bottom Layer w0.5: BH1.4@31,72.9 31,71.2 33.3,68.9 85.25,68.9 87.25,70.9 v1(87.25,71.95)
SB1.3: BH1.5 DD12.19 | length 117.4
  Top Layer w0.25: DD12.19@50.825,99.3 v1@52.9,99.3
  Bottom Layer w0.5: BH1.5@28.7,73 28.7,70.15 30.85,68 85.65,68 88.55,70.9 88.55,72.6 86.55,74.6 79.95,74.6 72.35,82.2 69,82.2 61.55,89.65 58.85,89.65 53.05,95.45 v1@53.05,99.35
  other v1: 52.95,99.4
SB2: BH1.2 DD12.27 | length 94.3
  Top Layer w0.25: DD12.27@53.3,95.3 53.3,91.096 59.546,84.85 75.05,84.85 83.5,76.4 v1(83.5,72.1)
  Bottom Layer w0.5: BH1.2@36.15,72.9 36.1,72.85 36.1,71.85 37.2,70.75 82.15,70.75 v1(83.5,72.1)
TCK: BH3.7 DD12.4 | length 62.3
  Top Layer w0.25: DD12.4@56.3,103.775 56.3,102.2 v1@56.35,102.15
  Top Layer w0.5: v1(77.6,94.5) 95,77.1 95,74.3 96.25,73.05 BH3.7@97.55,73.05
  Bottom Layer w0.5: v1(56.35,102.05) 56.35,95.45 59.6,92.2 75.25,92.2 77.55,94.5 v1(77.6,94.5)
TDO/TDI: BH3.1 C16.2 DD12.5 R43.1 | length 104.4
  Top Layer w0.3: DD12.5@55.8,103.8 55.8,105.05 56.25,105.5 R43.1@56.25,108.65
  Top Layer w0.5: v1(51.65,109.75) 51.65,109.925 51.55,110.025 C16.2@52.275,110.75 54.35,110.75 56.25,108.85 R43.1@56.25,108.65 ; v1(79.4,94.45) 86.8,87.05 110.25,87.05 117,80.3 117,73.25 116.45,72.7 BH3.1@113.35,72.7
  Bottom Layer w0.5: v1@51.55,109.85 v1(51.65,109.75) 51.65,106.55 54.3,103.9 58.9,103.9 62.1,100.7 77.55,100.7 78.85,99.4 78.85,95 v1(79.4,94.45)
TxD: BH3.12 DD12.32 R60.1 | length 62.3
  Top Layer w0.25: DD12.32@55.8,95.325 55.8,93.3 60.65,88.45 64.15,88.45 64.85,87.75 66.95,87.75 v1(67.25,87.45)
  Top Layer w0.5: BH3.12@102.7,75.75 BH3.12@102.9,75.95
  Top Layer w1: BH3.12@102.9,75.95 R60.1@102.9,81.55 R60.1@102.9,81.6
  Bottom Layer w0.5: v1(67.25,87.45) 69.9,87.45 74.95,82.4 74.95,82.277 79.977,77.25 101.7,77.25 BH3.12@102.9,76.05
ГБ1: BH1.7 DD12.11 | length 60.5
  Top Layer w0.25: v1@38.875,107.175 41.25,104.8 41.45,104.6 48.55,104.6 49,105.05 52.55,105.05 52.8,104.8 DD12.11@52.8,103.775
  Bottom Layer w0.5: BH1.7@23.5,72.61 20,76.11 20,87.95 29.45,97.4 38.7,106.65 v1@38.7,107.05 ; v1@38.65,106.75 38.65,107.1 v1@38.7,107.05 ; v1@38.7,107.2 v1@38.7,107.05
  other v1: 38.75,107.2
ГБ2: BH1.8 DD12.10 | length 41.4
  Top Layer w0.25: v1(47.8,105.7) 52.7,105.7 53.3,105.1 DD12.10@53.3,103.775
  Bottom Layer w0.5: BH1.8@38.74,75.15 38.74,85.34 47.8,94.4 v1(47.8,105.7) v1@47.8,105.75
ГБ3: BH1.9 DD12.9 | length 45.1
  Top Layer w0.25: v1@46.25,106.55 52.75,106.55 53.8,105.5 DD12.9@53.8,103.775
  Bottom Layer w0.5: BH1.9@36.2,75.15 36.2,85.35 46.3,95.45 v1@46.3,106.4
  other v1: 46.4,106.45
ГБ4: BH1.10 DD12.8 | length 48.6
  Top Layer w0.25: v1@45.05,107 45.3,107.25 47.3,107.25 47.525,107.025 53.175,107.025 ; 53.05,107.15 53.175,107.025 ; DD12.8@54.3,103.775 54.3,105.9 53.175,107.025
  Bottom Layer w0.5: BH1.10@33.66,75.15 33.66,85.56 44.95,96.85 v1(44.95,106.9)
ГБ5: BH1.11 DD12.15 | length 37.9
  Top Layer w0.25: v1@43.75,101.3 DD12.15@50.825,101.3
  Bottom Layer w0.5: BH1.11@31.12,75.15 31.12,85.47 43.6,97.95 v1@43.6,100.85
  other v1: 43.65,101
ГБ6: BH1.12 DD12.14 | length 41.4
  Top Layer w0.3: v1@42.25,101.55 42.5,101.8 v1@42.6,101.8 ; v1(42.3,101.5) v1@42.6,101.8 ; DD12.14@50.825,101.8 v1@42.6,101.8
  Bottom Layer w0.5: BH1.12@28.58,75.15 28.58,85.33 42.3,99.05 v1(42.3,101.5) v1@42.3,101.75
ГБ7: BH1.13 DD12.13 | length 43.7
  Top Layer w0.25: v1@40.55,102.3 DD12.13@50.825,102.3
  Bottom Layer w0.5: BH1.13@26.04,75.15 26.04,85.74 40.8,100.5 v1@40.8,102.45
  other v1: 40.8,102.3
ГБ8: BH1.14 DD12.12 | length 55.2
  Top Layer w0.25: v1@49.4,103.85 50.65,103.85 51.85,102.65 52.15,102.65 52.3,102.8 DD12.12@52.3,103.775
  Bottom Layer w0.5: BH1.14@23.5,75.15 23.5,89.6 41.8,107.9 47.5,107.9 49.45,105.95 v1@49.45,103.95
  other v1: 49.35,103.9
РИ: BH1.6 VT4.2 | length 106
  Top Layer w0.5: VT4.2@71.95,99.604 71.95,97.95 89.75,80.15 v1(89.75,72.65)
  Bottom Layer w0.5: BH1.6@26.15,72.85 25.95,72.65 25.95,70.1 29,67.05 86.6,67.05 89.75,70.2 v1(89.75,72.65)
pads on no net: BH3.2 BH3.3 BH3.5 BH3.6 BH3.8 BH3.10 BH3.11 BH3.13 DD1.13 DD1.16 DD2.13 DD2.16 DD3.13 DD3.16 DD4.13 DD4.16 DD5.13 DD5.16 DD6.13 DD6.16 DD12.16 DD12.17 DD12.18 DD12.40 DD12.41 XH6.5 XH6.6

## Polygon pours and split planes (outlines as drawn)
GND on Bottom Layer "NONET_L01_P-001" (solid, remove dead copper, pour order 16): 0,70 0,165.9 250,165.9 250,69.9
no net on Bottom Layer "NONET_L01_P-001" (solid, pour order 0): 0,69.4

## Keep-outs
Keep-Out Layer:
  lines w0.254: 92,149 ccw(c87,149) 92,149 ; 130,80 ccw(c125,80) 130,80 ; 168,149 ccw(c163,149) 168,149 ; 250,80 ccw(c245,80) 250,80